# Altium PCB ADO_Borad.PcbDoc
Units mm, origin at the board's own origin, x right, y up, seen from the top; angles counter-clockwise.
Board outline 59.06 x 45.85 mm, 2 copper layers (Top Layer, Bottom Layer); 8 components, 8 nets, 26 pads, 0 vias.
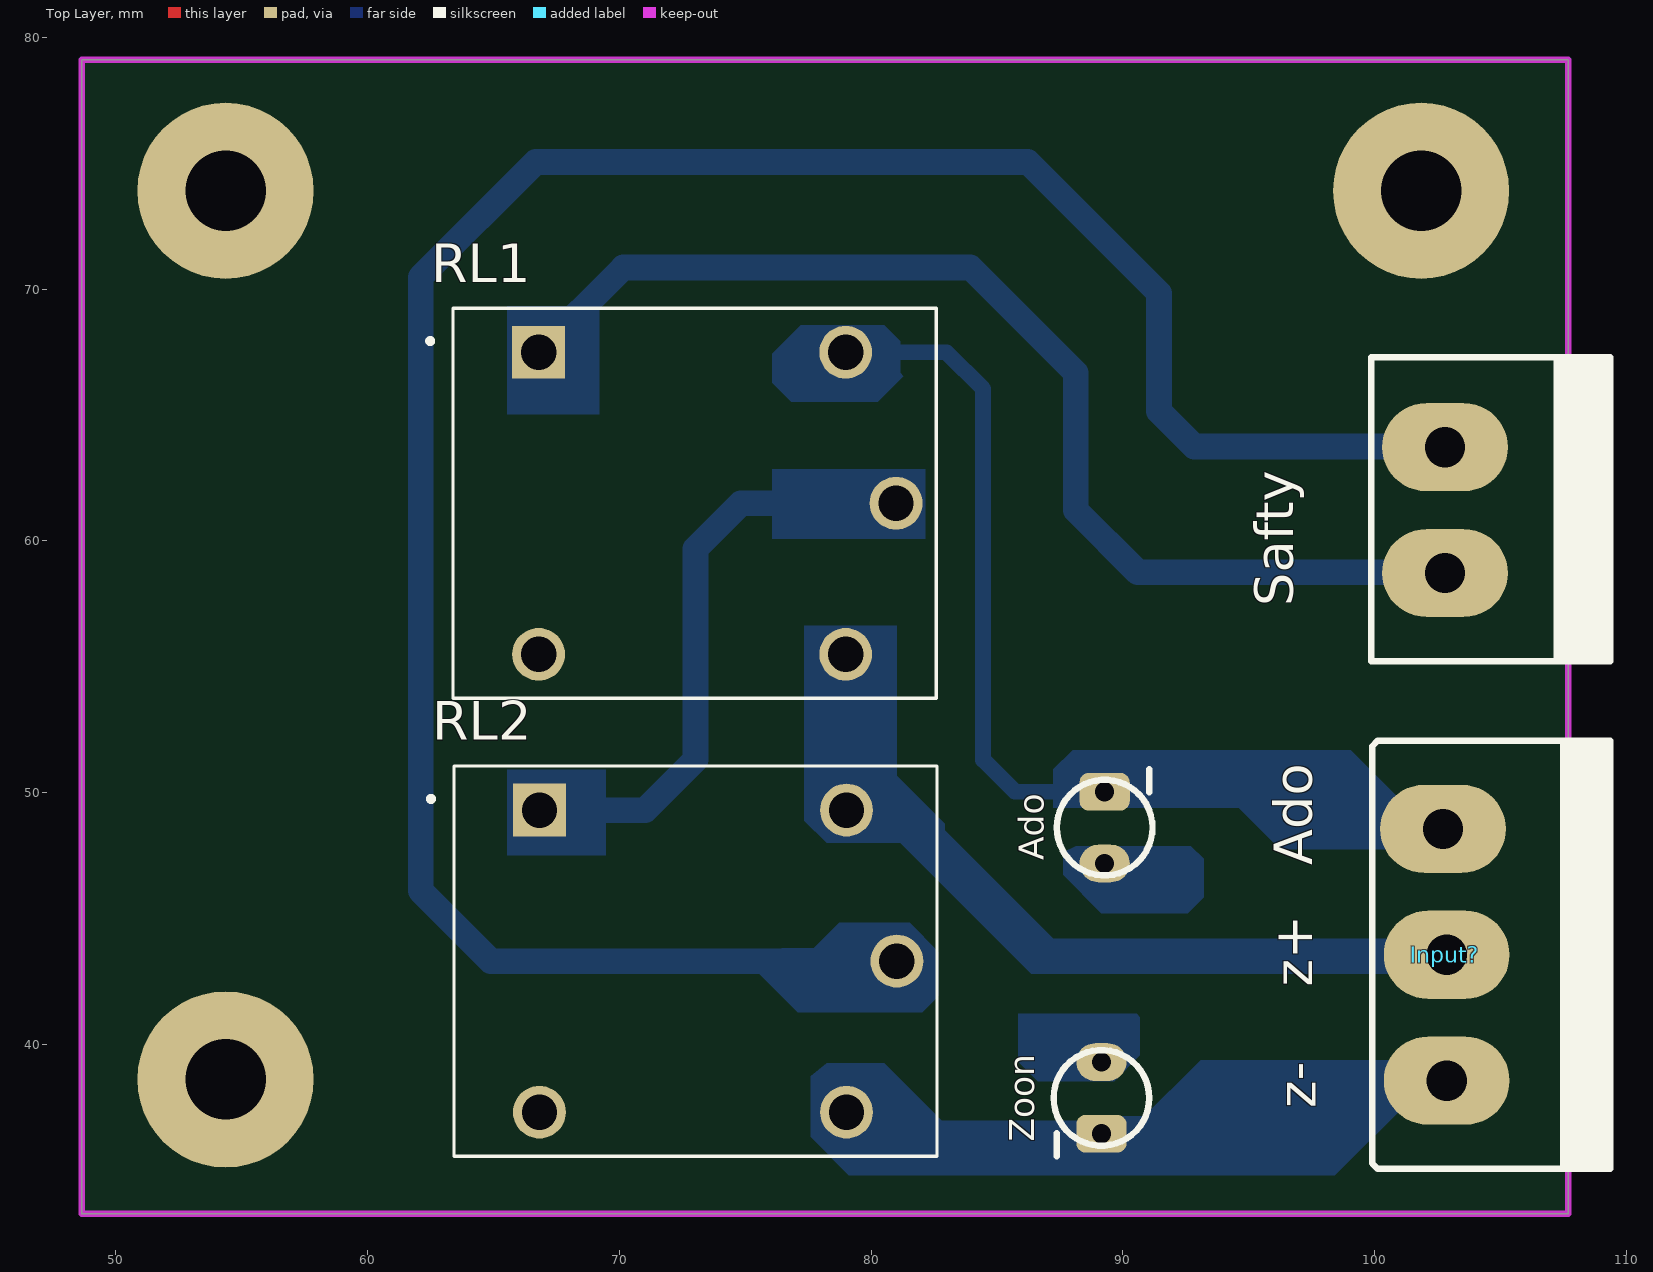
[diagram p0: Top Layer view]
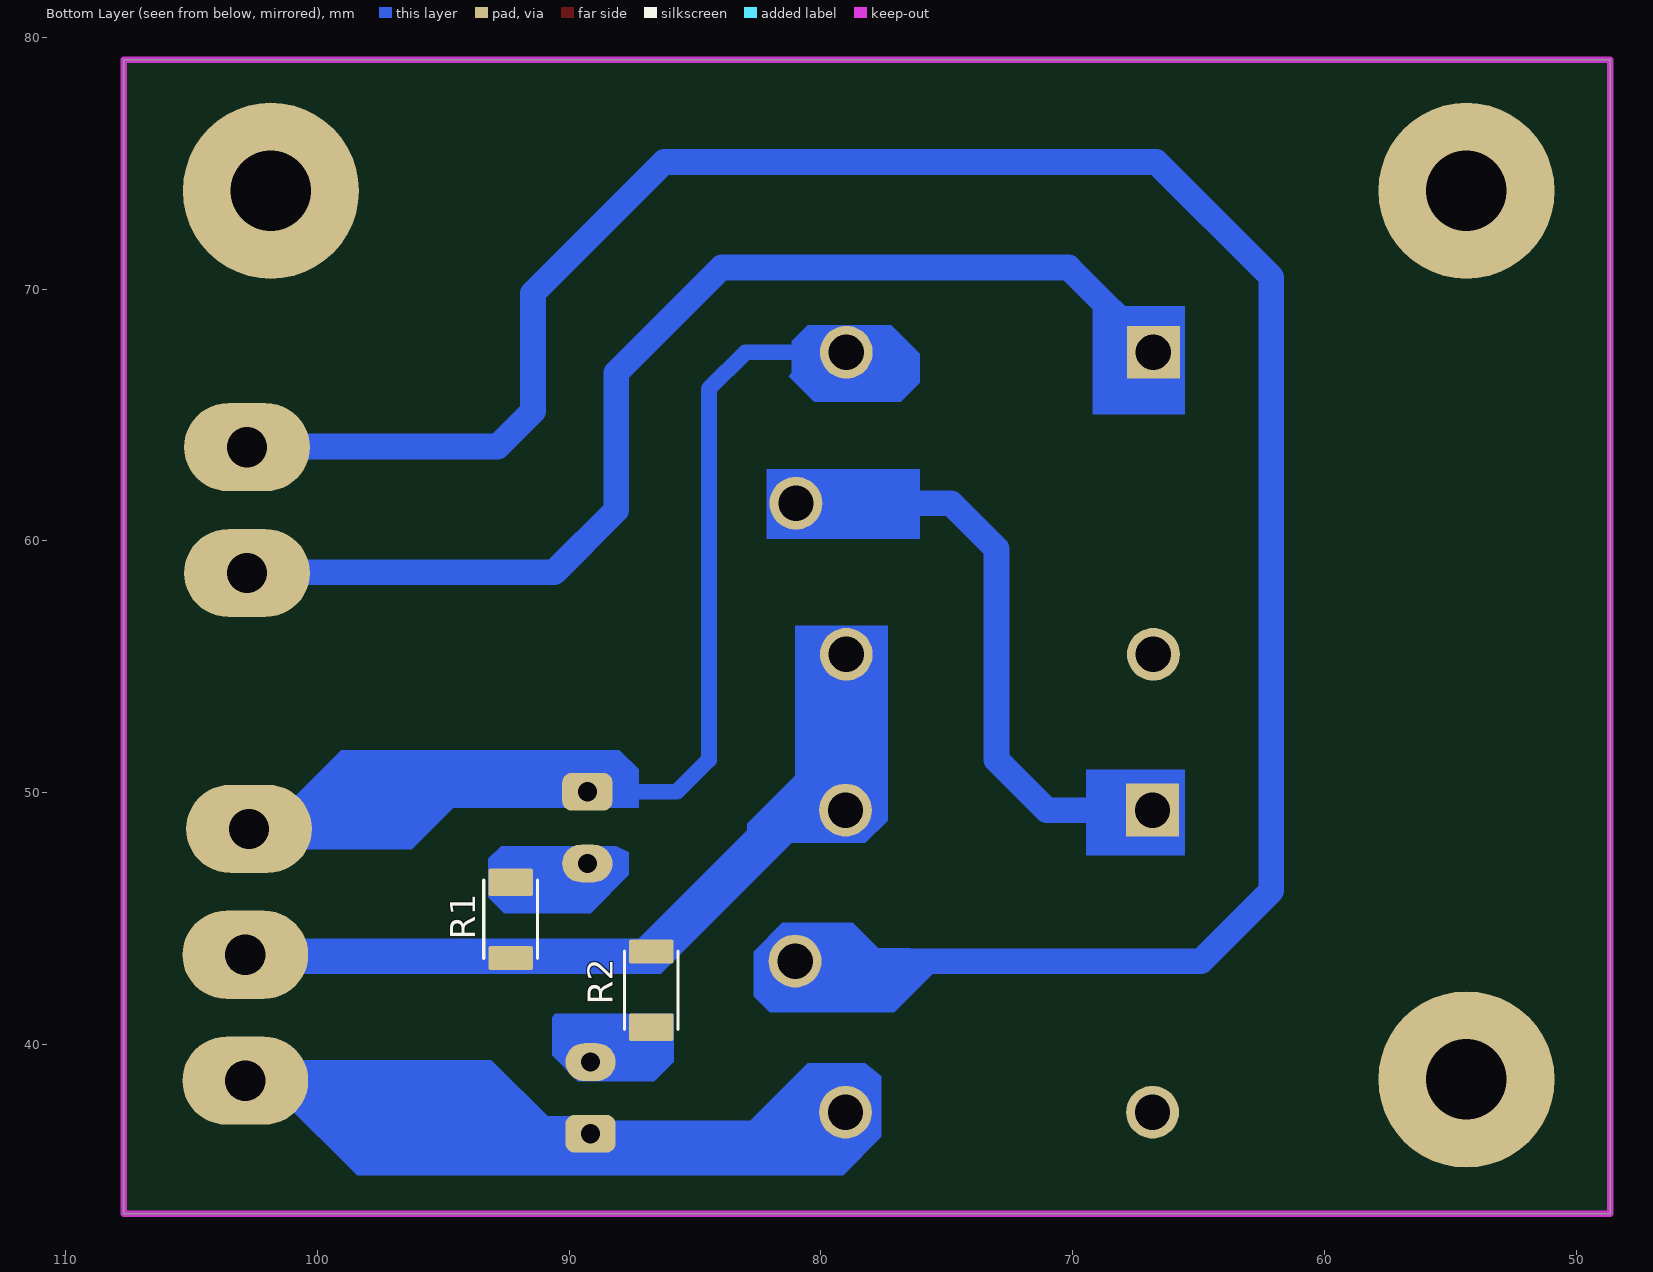
[diagram p1: Bottom Layer view, seen from below]
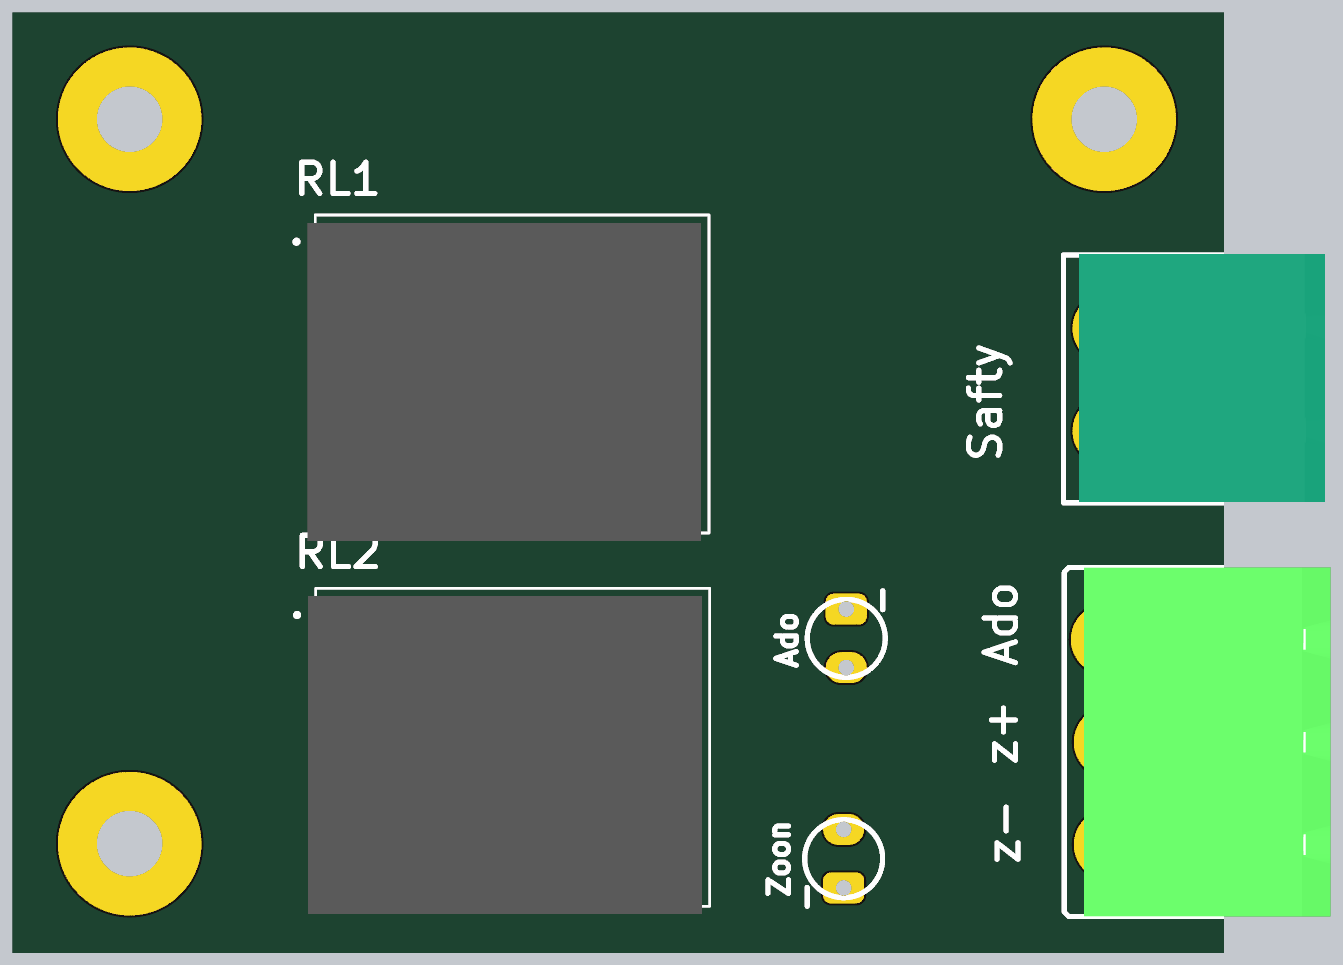
[diagram p2: 3D render of the assembled board from above, using the file's embedded part models]

## Layer stack, top to bottom
Top Solder: solder mask 0.0102, Solder Resist, Dk 3.5
Top Layer: signal copper 0.0356
Dielectric 1: dielectric 0.32, FR-4, Dk 4.8
Bottom Layer: signal copper 0.0356
Bottom Solder: solder mask 0.0102, Solder Resist, Dk 3.5

## Board outline
48.641,33.274 48.641,79.121 107.696,79.121 107.696,33.274

## Design rules (kind name [scope] priority, off if disabled: settings)
Clearance [All] p1: gap=0.381 ignorepadtopadclearanceinfootprint=FALSE
PolygonConnect [All] p1: connectstyle=Relief reliefconductorwidth=0.254 reliefentries=4 polygonreliefangle="90 Angle" airgapwidth=0.254
RoutingVias [All] p1: holewidth=0.711 width=1.27 viastyle="Through Hole" minholewidth=0.711 minwidth=1.27 maxholewidth=0.711 maxwidth=1.27
SolderMaskExpansion [All] p1: expansion=0.102 istentingtop=FALSE
Width [All] p1: maxlimit=2.54 minlimit=0.254 preferedwidth=0.254 minimp=50.000000 maximp=50.000000 favimp=50.000000
30 further rules are at their usual default settings.

## Components (designator, comment, footprint, x,y, rotation, side; value= is the part's Value field where it differs from the comment)
Ado "Red" led/3MM/DIP 89.281,50.038 r270 top (schematic designator L1)
Input? "Ph3" CONECTOR/FONIX/3PIN 102.87,38.561 r90 top
R1 "10k" RES/1206 92.46,44.97 r270 bottom
R2 "10k" RES/1206 86.61,42.152 r90 bottom
RL1 "RELAY-5V" RELAY-5V 66.771,55.53 r0 top
RL2 "RELAY-5V" RELAY-5V 66.803,37.338 r0 top
Safty "PH2" CONECTOR/FONIX/2PIN 102.87,58.801 r90 top (schematic designator Safty?)
Zoon "Red" led/3MM/DIP 89.154,36.449 r90 top (schematic designator L2)

## Footprints (in the part's own frame and the unit in brackets; to place one, negate y for a bottom-side part, rotate by r counter-clockwise, add the part's x,y. Pads: shape width x height; smd on the part's side, far side on the other; paste and mask are expansions set on the pad)
CONECTOR/FONIX/2PIN [mm]
  oval 3.5x5 hole 1.6: 1(-0.073,0.063) 2(4.927,0.063)
  silkscreen extent -3.58,-6.5 8.5,3, body extent -3.54,-9.75 8.54,2.25, height 3
CONECTOR/FONIX/3PIN [mm]
  oval 3.5x5 hole 1.6: 1(0,0) 2(5,0) 3(10,0.144)
  silkscreen extent -3.5,-6.5 13.5,2.96, body extent -3.5,-10 13.5,2, height 8.8
led/3MM/DIP [mm]
  oval 1.5x2 hole 0.762: A(2.85,0)
  rrect50% 1.5x2 hole 0.762: K(0,0)
  silkscreen extent -0.89,-1.9 3.32,1.9
RELAY-5V [mm]
  rect 2.1x2.1 hole 1.4: 1(0.023,11.969)
  round 2.1 hole 1.4: 2(0.023,-0.031) 3(12.223,11.969) 4(14.223,5.969) 5(12.223,-0.031)
  silkscreen extent -4.39,-1.78 15.82,13.72, body extent -3.76,-2.16 15.44,13.34, height 15.34
RES/1206 [mm]
  rrect14% 1.09x1.77 smd: 1(-1.469,0.131)
  rrect14% 0.94x1.77 smd: 2(1.536,0.131)
  silkscreen extent -1.55,-0.93 1.55,1.2, body extent -1.51,-0.65 1.59,0.9, height 0.55

## Part data
Ado Zoon: library part LED-1COLER
Input?: library part CONECTOR/FONIX/3PIN
R1 R2: library part RES/SMD
Safty: library part CONECTOR/FONIX/2PIN

## Free pads (board coordinates)
  round 7 hole 3.2: V(54.356,38.608) V(54.356,73.914) V(101.854,73.914)

## Nets (pads, with @x,y where several pads share a name; then routed paths per layer and width w, separated by ;. In a path a pad name is that pad's centre, name@x,y a point inside that pad or via, vN(x,y) a via of type N, cw(c..) or ccw(c..) an arc to the next point about the centre after c; other vN are vias at no path point)
NetInput?_1: Input?.1 RL2.5 Zoon.K | length 21.4
  Bottom Layer w0.635: RL2.5 79.272,37.307 80.13,36.449 Zoon.K 89.535,36.83 91.948,36.83 93.726,38.608 99.187,38.608
NetInput?_2: Input?.2 R1.2 R2.2 RL1.5 RL2.3 | length 28.7
  Bottom Layer w0.635: RL1.5 79.01,55.483 79.01,49.323 RL2.3 79.187,49.146 81.029,49.146 86.567,43.608 99.187,43.608
NetInput?_3: Ado.K Input?.3 RL1.3 | length 36.5
  Bottom Layer w0.635: RL1.3 82.996,67.499 84.455,66.04 84.455,51.308 85.725,50.038 Ado.K 96.088,50.038 97.518,48.608 99.043,48.608
NetL1_A: Ado.A R1.1 | length 3.4
  Bottom Layer w0.635: Ado.A 89.281,46.092 89.653,45.72 91.405,45.72 91.44,45.685
NetL2_A: R2.1 Zoon.A | length 0.1
  Bottom Layer w0.635: Zoon.A@89.09,39.362 Zoon.A
NetRL1_1: RL1.1 Safty.1 | length 45.6
  Bottom Layer w1.016: RL1.1 70.161,70.866 83.947,70.866 88.138,66.675 88.138,61.214 90.598,58.754 102.781,58.754 Safty.1
NetRL1_4: RL1.4 RL2.1 | length 24.1
  Bottom Layer w1.016: RL2.1 71.024,49.307 73.025,51.308 73.025,59.69 74.834,61.499 RL1.4
NetRL2_4: RL2.4 Safty.2 | length 94.5
  Bottom Layer w1.016: RL2.4 64.897,43.307 62.103,46.101 62.103,70.485 66.675,75.057 86.233,75.057 91.44,69.85 91.44,65.151 92.837,63.754 102.781,63.754 Safty.2
pads on no net: RL1.2 RL2.2

## Keep-outs
Keep-Out Layer:
  the board outline again, w0.254

## Other copper
Bottom Layer:
  rectangle net NetRL1_4: 65.532,47.498 69.469,50.927
  rectangle net NetRL1_1: 65.532,65.024 69.215,69.342
  rectangle net NetRL1_4: 76.073,60.071 82.169,62.865
  region net NetRL2_4: 76.454,43.815 77.724,43.815 78.74,44.831 81.534,44.831 82.677,43.688 82.677,41.91 82.042,41.275 77.089,41.275 75.438,42.926
  region net NetInput?_3: 91.567,49.403 91.948,49.784 91.948,51.689 88.011,51.689 87.249,50.927 87.249,49.403
  region net NetInput?_3: 80.518,68.58 77.216,68.58 76.073,67.437 76.073,66.294 76.835,65.532 80.264,65.532 81.28,66.548 81.153,66.675 81.153,67.945
  region net NetInput?_1: 77.597,38.735 77.597,36.322 79.121,34.798 98.425,34.798 101.473,37.846 101.473,39.37 95.758,39.37 93.091,39.37 90.678,36.957 82.804,36.957 80.518,39.243 78.232,39.243
  region net NetInput?_3: 91.948,51.689 99.06,51.689 101.219,49.53 101.219,47.752 96.266,47.752 94.615,49.403 91.567,49.403
  region net NetInput?_2: 77.343,56.642 77.343,48.895 78.232,48.006 81.153,48.006 86.36,42.799 100.711,42.799 102.108,44.196 87.249,44.196 82.931,48.514 82.931,48.768 81.026,50.673 81.026,56.134 81.026,56.642
  region net NetL1_A: 88.138,47.879 92.71,47.879 93.218,47.371 93.218,45.847 92.583,45.212 89.154,45.212 87.63,46.736 87.63,47.625
  region net NetL2_A: 87.503,41.212 90.551,41.212 90.678,41.085 90.678,39.561 89.662,38.545 86.614,38.544 85.852,39.306 85.852,41.212

## Silkscreen, mask and mechanical layers (free items; w line width, h text height)
Top Overlay:
  text "Ado" at 97.536,47.117 h1.52 r90
  text "z+" at 97.536,42.291 h1.52 r90
  text "z-" at 97.663,37.465 h1.52 r90